# Altium PCB CTR-Upper-Main-Board-Rev-A.PcbDoc
Units mm, origin at the board's own origin, x right, y up, seen from the top; angles counter-clockwise.
Board outline 39.6 x 39.89 mm, 2 copper layers (Top Layer, Bottom Layer), stack 1.554 mm thick; 16 components, 8 nets, 34 pads, 26 vias.
Unrouted connection lines stored in the file: 20.
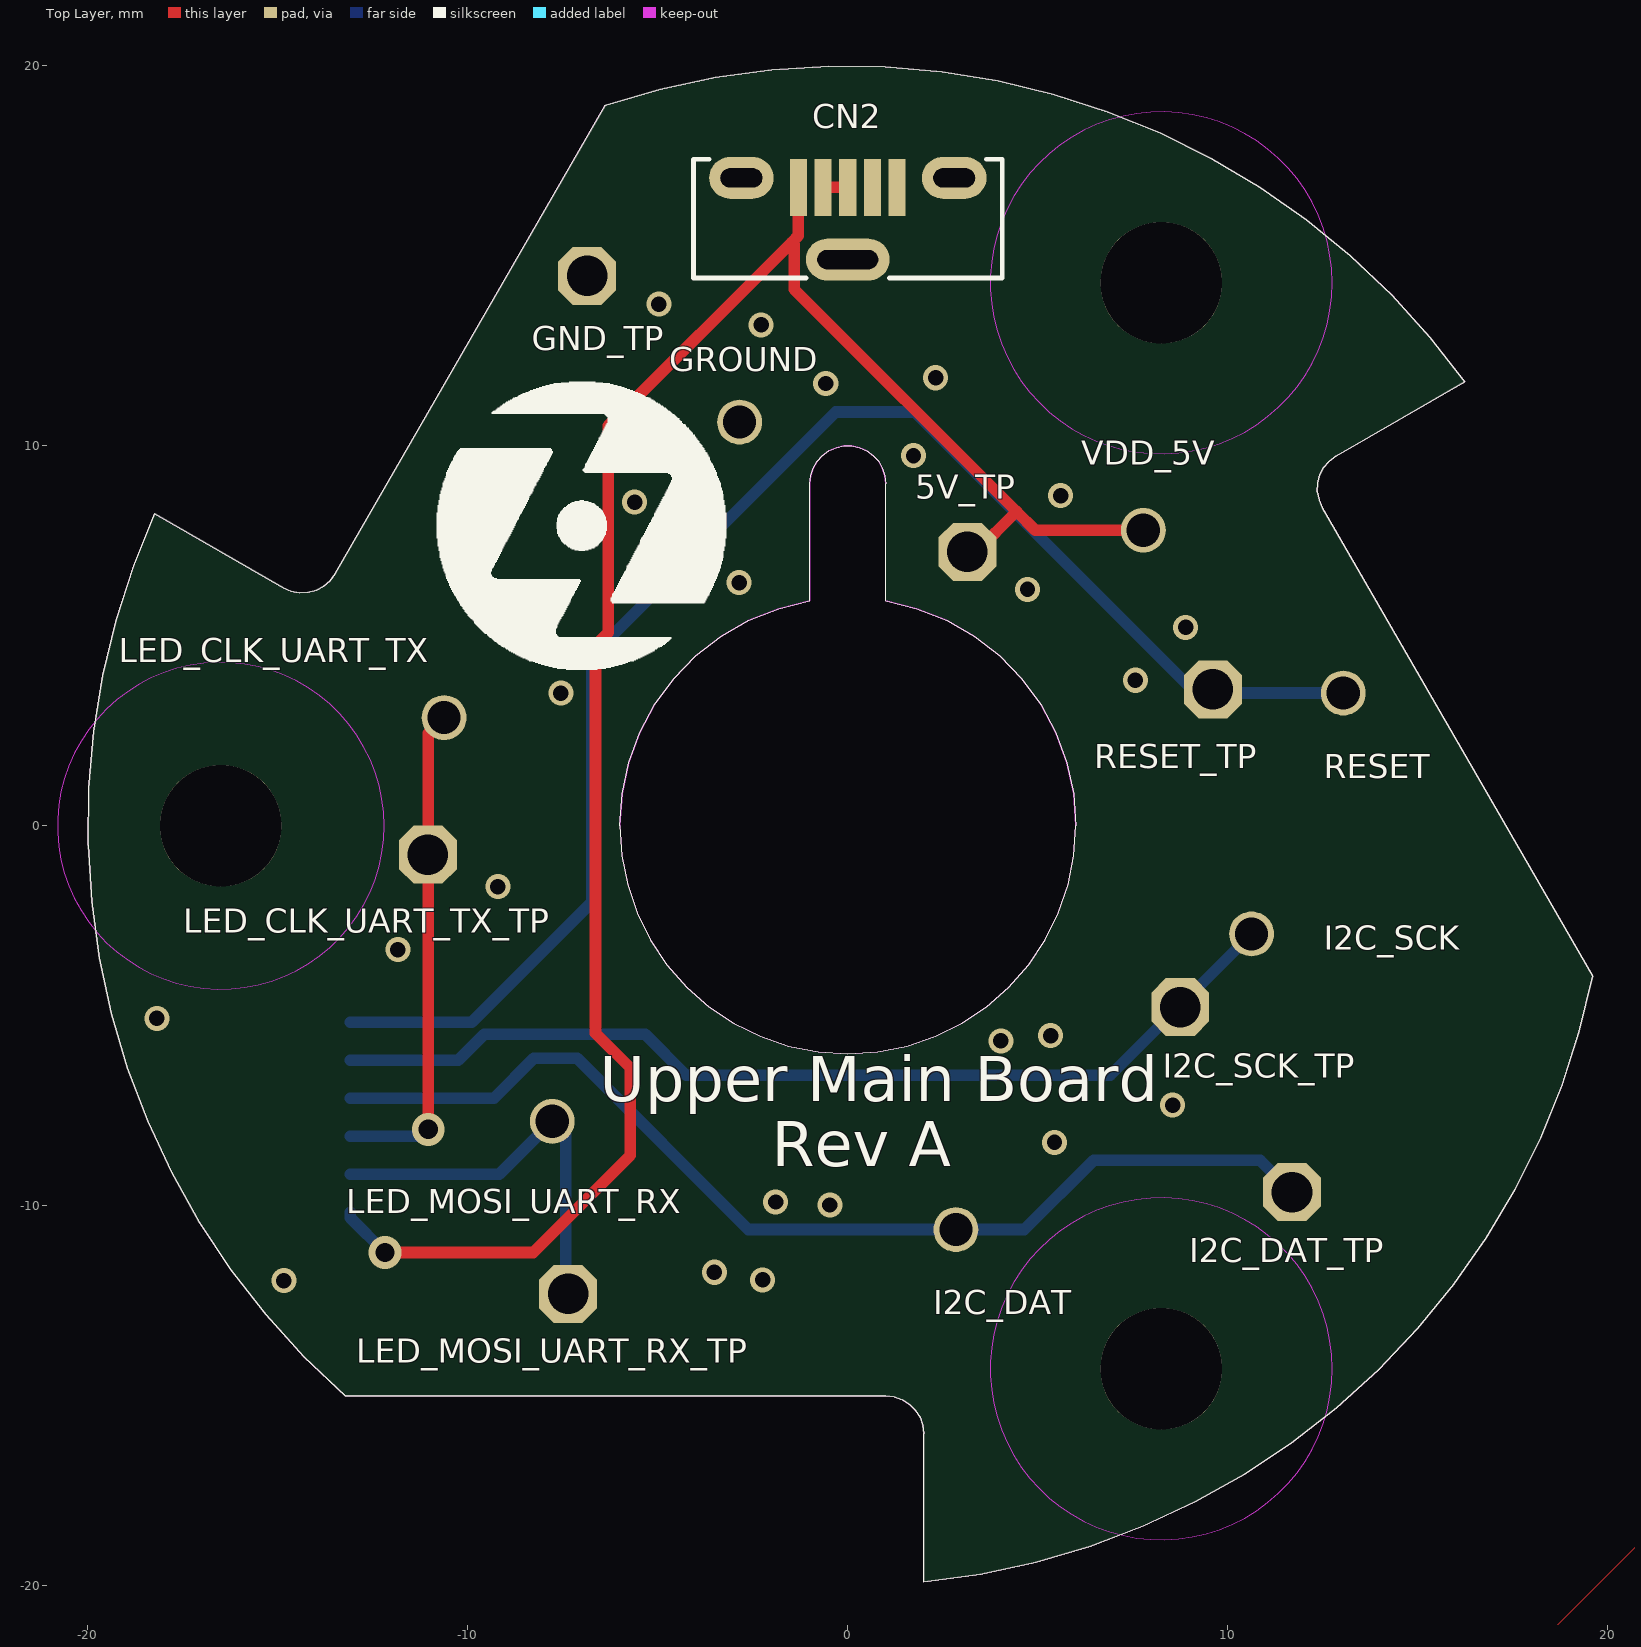
[diagram p0: Top Layer view]
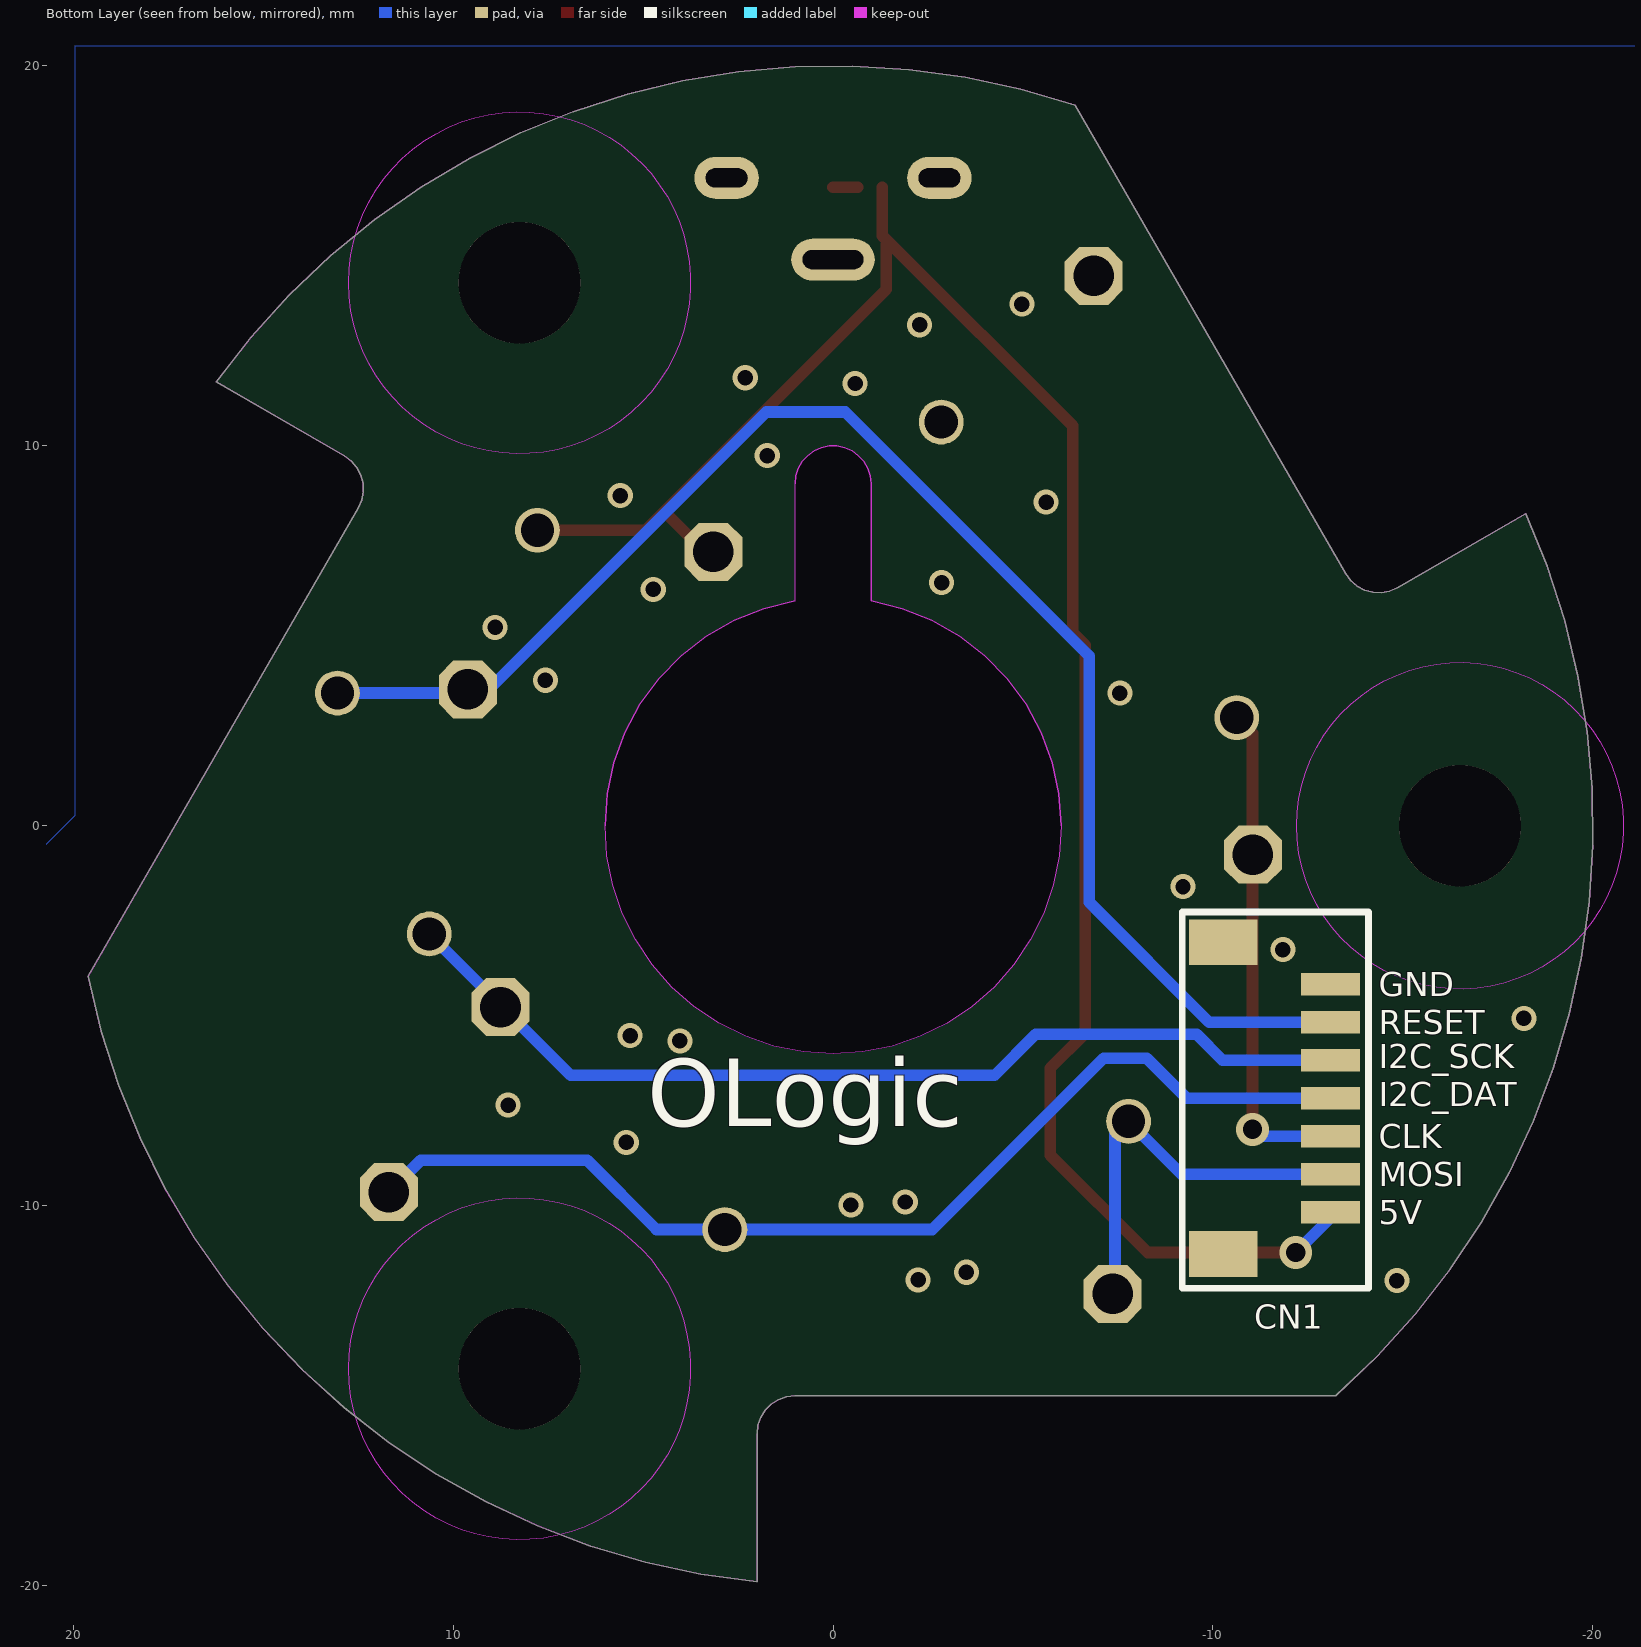
[diagram p1: Bottom Layer view, seen from below]

## Layer stack, top to bottom
Top Solder: solder mask 0.0102, Solder Resist, Dk 3.5
Top Layer: signal copper 0.0457
Dielectric1: core 1.463, Dk 4.2
Bottom Layer: signal copper 0.0457
Bottom Solder: solder mask 0.0102, Solder Resist, Dk 3.5

## Board outline
-13.49,6.634 -6.376,18.956 -4.942,19.38 -3.48,19.695 -1.998,19.9 -0.506,19.994 0.99,19.975 2.48,19.846 3.956,19.605 5.41,19.255 6.833,18.796 8.219,18.233 9.558,17.568 10.844,16.805 12.07,15.948 13.227,15.001 14.311,13.971 15.315,12.862 16.234,11.682 12.856,9.732 12.676,9.599 12.53,9.429 12.426,9.231 12.368,9.015 12.359,8.791 12.401,8.571 12.49,8.366 19.605,-3.956 19.254,-5.41 18.796,-6.834 18.233,-8.219 17.568,-9.559 16.804,-10.845 15.947,-12.07 15.001,-13.228 13.97,-14.312 12.862,-15.316 11.681,-16.234 10.435,-17.062 9.131,-17.794 7.776,-18.426 6.378,-18.956 4.943,-19.379 3.481,-19.695 2,-19.9 2,-16 1.975,-15.777 1.901,-15.566 1.782,-15.377 1.623,-15.218 1.434,-15.099 1.223,-15.025 1,-15 -13.229,-15 -14.313,-13.97 -15.316,-12.861 -16.235,-11.681 -17.062,-10.435 -17.794,-9.131 -18.427,-7.775 -18.956,-6.377 -19.38,-4.942 -19.695,-3.481 -19.9,-1.999 -19.994,-0.507 -19.976,0.989 -19.846,2.479 -19.605,3.955 -19.255,5.409 -18.797,6.832 -18.234,8.218 -14.856,6.268 -14.651,6.178 -14.431,6.137 -14.207,6.145 -13.991,6.203 -13.793,6.308 -13.623,6.454
cut-out: -1,9 -1,5.916 -1.818,5.718 -2.6,5.408 -3.33,4.991 -3.996,4.476 -4.583,3.873 -5.079,3.194 -5.476,2.452 -5.765,1.662 -5.941,0.839 -6,0 -5.949,-0.783 -5.796,-1.553 -5.543,-2.296 -5.196,-3 -4.76,-3.653 -4.243,-4.243 -3.653,-4.76 -3,-5.196 -2.296,-5.543 -1.553,-5.796 -0.783,-5.949 0,-6 0.783,-5.949 1.553,-5.796 2.296,-5.543 3,-5.196 3.653,-4.76 4.243,-4.243 4.76,-3.653 5.196,-3 5.543,-2.296 5.796,-1.553 5.949,-0.783 6,0 5.941,0.839 5.765,1.662 5.476,2.452 5.079,3.194 4.583,3.873 3.996,4.476 3.33,4.991 2.6,5.408 1.818,5.718 1,5.916 1,9 0.978,9.208 0.914,9.407 0.809,9.588 0.669,9.743 0.5,9.866 0.309,9.951 0.105,9.995 -0.105,9.995 -0.309,9.951 -0.5,9.866 -0.669,9.743 -0.809,9.588 -0.914,9.407 -0.978,9.208

## Design rules (kind name [scope] priority, off if disabled: settings)
Clearance [All] p1: gap=0.152 ignorepadtopadclearanceinfootprint=FALSE except(0: Arc-Hole Track-Hole SMDPad-Hole THPad-Hole Via-Hole Fill-Hole Poly-Hole Region-Hole Text-Hole)
ComponentClearance ComponentClearance_BAT [InComponent('BT1') vs InComponent('CN3')] p1: gap=0 collisioncheckmode=3 verticalgap=0 showdistances=FALSE
ComponentClearance [All] p2: gap=0.178 collisioncheckmode=3 verticalgap=0.178 showdistances=FALSE
HoleSize [All] p1: absolutevalues=TRUE maxlimit=7.62 minlimit=0.254 maxpercent=80.000 minpercent=20.000
HoleToHoleClearance [All] p1: gap=0.178 allowstackedmicrovias=TRUE
MinimumSolderMaskSliver [InNet('VIN')] p1: minsoldermaskwidth=0.013
NetAntennae NetAntennae_ANT [InNetClass('ANT')] p1: netantennaetolerance=0
NetAntennae [All] p2: netantennaetolerance=0
PolygonConnect [All] p1: connectstyle=Relief reliefconductorwidth=0.254 reliefentries=4 polygonreliefangle="90 Angle" airgapwidth=0.254
RoutingVias [All] p1: holewidth=0.508 width=0.864 viastyle="Through Hole" minholewidth=0.254 minwidth=0.559 maxholewidth=0.889 maxwidth=1.27
SMDNeckDown [All] p1: percent=120.000
SilkToBoardRegionClearance [InNet('3.3V')] p1:
SilkToSilkClearance [All] p1: silktosilkclearance=0
SilkToSolderMaskClearance [IsPad] p1: minsilkscreentomaskgap=0 clearancetoexposedcopper=TRUE
SolderMaskExpansion [All] p1: expansion=0.102
Width Width_BT [InNetClass('BT')] p1: maxlimit=1.016 minlimit=0.254 preferedwidth=0.381
Width Width_VDD [InNet('3.3V')] p2: maxlimit=0.508 minlimit=0.178 preferedwidth=0.254
Width [All] p3: maxlimit=0.762 minlimit=0.152 preferedwidth=0.178
22 further rules are at their usual default settings.

## Classes and differential pairs
component class IMU: 5V_TP GND_TP I2C_DAT_TP I2C_SCK_TP LED_CLK_UART_TX_TP LED_MOSI_UART_RX_TP RESET_TP

## Components (designator, comment, footprint, x,y, rotation, side; value= is the part's Value field where it differs from the comment)
5V_TP "Test Point" "TestPoint-TH 42 mil" 3.15,7.21 r90 top
CN1 "JST-BM07B-SRSS-TB(LF)(SN)" JST-BM07B-SRSS-TB(LF)(SN) -11.278,-7.17 r90 bottom
CN2 "USB-uB-V" MOLEX_105133-0011 0,16 r0 top
GND_TP "Test Point" "TestPoint-TH 42 mil" -6.86,14.47 r90 top
GROUND "Pogo Pin Target Large" CTR_POGO_PIN_TARGET -2.847,10.625 r90 top
I2C_DAT "Pogo Pin Target Large" CTR_POGO_PIN_TARGET 2.847,-10.625 r90 top
I2C_DAT_TP "Test Point" "TestPoint-TH 42 mil" 11.69,-9.64 r90 top
I2C_SCK "Pogo Pin Target Large" CTR_POGO_PIN_TARGET 10.625,-2.847 r90 top
I2C_SCK_TP "Test Point" "TestPoint-TH 42 mil" 8.75,-4.77 r90 top
LED_CLK_UART_TX "Pogo Pin Target Large" CTR_POGO_PIN_TARGET -10.625,2.847 r90 top
LED_CLK_UART_TX_TP "Test Point" "TestPoint-TH 42 mil" -11.05,-0.76 r90 top
LED_MOSI_UART_RX "Pogo Pin Target Large" CTR_POGO_PIN_TARGET -7.778,-7.778 r90 top
LED_MOSI_UART_RX_TP "Test Point" "TestPoint-TH 42 mil" -7.36,-12.32 r90 top
RESET "Pogo Pin Target Large" CTR_POGO_PIN_TARGET 13.04,3.494 r90 top
RESET_TP "Test Point" "TestPoint-TH 42 mil" 9.61,3.59 r90 top
VDD_5V "Pogo Pin Target Large" CTR_POGO_PIN_TARGET 7.778,7.778 r90 top

## Footprints (in the part's own frame and the unit in brackets; to place one, negate y for a bottom-side part, rotate by r counter-clockwise, add the part's x,y. Pads: shape width x height; smd on the part's side, far side on the other; paste and mask are expansions set on the pad)
CTR_POGO_PIN_TARGET [mil] "Through-hole pogo pin target"
  round 46.5 hole 34.5: 1(0,0)
  body extent -43,-43 44,44, height 266
JST-BM07B-SRSS-TB(LF)(SN) [mm] "7 Position x 1mm Top Entry Locking Header"
  rect 1.2x1.8 smd: 0(-4.1,1.013) 0(4.1,1.013)
  rect 0.6x1.55 smd: 1(-3,-1.812) 2(-2,-1.812) 3(-1,-1.812) 4(0,-1.812) 5(1,-1.812) 6(2,-1.812) 7(3,-1.812)
  silkscreen extent -5,-2.81 4.9,2.09, body extent -4.5,-1.81 4.5,1.79, height 4.25
MOLEX_105133-0011 [mm] "Connector, USB Receptacle Right Angle; 8 pin, 8.00 mm L X 3.00 mm W X 6.70 mm H body"
  rrect100% 1.7x1.1 hole 0.5 slot 1.1 at 0 deg paste-1.7: 0(-2.8,1.05) 0(2.8,1.05)
  rrect100% 2.2x1.1 hole 0.5 slot 1.6 at 0 deg paste-2.2: 0(0,-1.1)
  rect 0.45x1.5 smd: 1(-1.3,0.8) 2(-0.65,0.8) 3(0,0.8) 4(0.65,0.8) 5(1.3,0.8)
  silkscreen extent -4.06,-1.58 4.06,1.54, body extent -4.03,-1.58 3.97,1.43, height 6.71
"TestPoint-TH 42 mil" [mil] "Test Point - Thru-Hole 42 mil"
  oct 60x60 hole 42: 1(0,0)

## Part data
5V_TP GND_TP I2C_DAT_TP I2C_SCK_TP LED_CLK_UART_TX_TP LED_MOSI_UART_RX_TP RESET_TP: library part "TestPoint, small"
CN1: "1mm Locking Header, 7-Pin"
CN2: library part USB-MicroB-V, "USB, Micro-B, Vertical"
GROUND I2C_DAT I2C_SCK LED_CLK_UART_TX LED_MOSI_UART_RX RESET VDD_5V: library part "CTR Pogo Pin Target Large", "CTR Pogo Pin Target Large"

## Free pads (board coordinates)
  round 3.2 hole 3.2: 1(-16.5,0) 1(8.25,-14.289) 1(8.25,14.289)

## Via types
v1: diameter 0.66, hole 0.406, Top Layer to Bottom Layer, tented bottom, 24 vias
v2: diameter 0.864, hole 0.508, Top Layer to Bottom Layer, tented both sides, 2 vias

## Nets (pads, with @x,y where several pads share a name; then routed paths per layer and width w, separated by ;. In a path a pad name is that pad's centre, name@x,y a point inside that pad or via, vN(x,y) a via of type N, cw(c..) or ccw(c..) an arc to the next point about the centre after c; other vN are vias at no path point)
5V: 5V_TP.1 CN1.1 CN2.1 VDD_5V.1 | length 51.8
  Top Layer w0.305: v2(-12.18,-11.23) -8.28,-11.23 -5.72,-8.67 -5.72,-6.376 -6.64,-5.456 -6.64,4.751 -6.305,5.086 -6.305,10.525 -1.47,15.36 ; CN2.1 -1.3,15.53 -1.47,15.36 ; 5V_TP.1 3.38,7.21 4.44,8.27 ; VDD_5V.1 4.932,7.778 4.44,8.27 ; -1.47,15.36 -1.405,15.295 -1.405,14.115 4.44,8.27
  Bottom Layer w0.305: CN1.1 -13.09,-10.32 v2(-12.18,-11.23)
GND: CN1.0 CN1.7 CN2.0 CN2.5 GND_TP.1 GROUND.1
  other v1: -14.84,-11.97 -2.24,-11.95 -3.51,-11.75 -0.47,-9.98 -1.9,-9.9 5.44,-8.33 8.55,-7.35 4.03,-5.66 5.34,-5.52 -18.18,-5.07 -11.84,-3.26 -9.21,-1.6
NetCN1_2: CN1.2 LED_MOSI_UART_RX.1 LED_MOSI_UART_RX_TP.1 | length 10.6
  Bottom Layer w0.305: CN1.2 -9.17,-9.17 LED_MOSI_UART_RX.1 -7.42,-8.136 LED_MOSI_UART_RX_TP.1@-7.42,-12.32
NetCN1_3: CN1.3 LED_CLK_UART_TX.1 LED_CLK_UART_TX_TP.1 | length 13.1
  Top Layer w0.305: v2(-11.04,-7.99) -11.04,2.432 LED_CLK_UART_TX.1
  Bottom Layer w0.305: CN1.3 -11.22,-8.17 v2(-11.04,-7.99)
NetCN1_4: CN1.4 I2C_DAT.1 I2C_DAT_TP.1 | length 28.2
  Bottom Layer w0.305: CN1.4 -9.31,-7.17 -8.26,-6.12 -7.12,-6.12 -2.615,-10.625 I2C_DAT.1 4.645,-10.625 6.47,-8.8 10.85,-8.8 I2C_DAT_TP.1
NetCN1_5: CN1.5 I2C_SCK.1 I2C_SCK_TP.1 | length 26
  Bottom Layer w0.305: CN1.5 -10.25,-6.17 -9.57,-5.49 -5.33,-5.49 -4.25,-6.57 6.902,-6.57 I2C_SCK.1
NetCN1_6: CN1.6 RESET.1 RESET_TP.1 | length 39.6
  Bottom Layer w0.305: CN1.6 -9.897,-5.17 -6.74,-2.013 -6.74,4.468 -0.318,10.89 1.76,10.89 9.156,3.494 RESET.1
NetCN2_2: CN2.2 CN2.3 | length 0.7
  Top Layer w0.305: CN2.2 CN2.3
pads on no net: CN2.4
copper on no net:
  other v1: -7.55,3.49 7.57,3.83 8.89,5.22 4.73,6.22 -2.86,6.4 -5.61,8.52 5.6,8.69 1.73,9.74 -0.58,11.64 2.31,11.79 -2.28,13.18 -4.97,13.73

## Polygon pours and split planes (outlines as drawn)
GND on Top Layer "GND_L01_P002" (solid, remove dead copper, shelved, pour order 2): -25.18,22.7 -24.64,22.16 20.93,22.16 20.93,-18.77 17.6,-22.1 17.38,-21.88 -27.09,-21.88
GND on Bottom Layer "GND_L02_P000" (solid, remove dead copper, shelved, pour order 0): -22.45,20.9 -22.07,20.52 19.95,20.52 19.95,0.27 22.68,-2.46 22.14,-3 22.14,-23.85 -23.54,-23.85 -23.76,-23.63

## Keep-outs
Keep-Out Layer:
  circle w0.025: c-16.5,0 r4.3
  circle w0.025: c8.25,-14.289 r4.5
  circle w0.025: c8.25,14.289 r4.5
  lines w0.025: -19.994,-0.507 -19.9,-1.999 -19.695,-3.481 -19.38,-4.942 -18.956,-6.377 -18.427,-7.775 -17.794,-9.131 -17.062,-10.435 -16.235,-11.681 -15.316,-12.861 -14.313,-13.97 -13.229,-15 1,-15 1.223,-15.025 1.434,-15.099 1.623,-15.218 1.782,-15.377 1.901,-15.566 1.975,-15.777 2,-16 2,-19.9 3.481,-19.695 4.943,-19.379 6.378,-18.956 7.776,-18.426 9.131,-17.794 10.435,-17.062 11.681,-16.234 12.862,-15.316 13.97,-14.312 15.001,-13.228 15.947,-12.07 16.804,-10.845 17.568,-9.559 18.233,-8.219 18.796,-6.834 19.254,-5.41 19.605,-3.956 12.49,8.366 12.401,8.571 12.359,8.791 12.368,9.015 12.426,9.231 12.53,9.429 12.676,9.599 12.856,9.732 16.234,11.682 15.315,12.862 14.311,13.971 13.227,15.001 12.07,15.948 10.844,16.805 9.558,17.568 8.219,18.233 6.833,18.796 5.41,19.255 3.956,19.605 2.48,19.846 0.99,19.975 -0.506,19.994 -1.998,19.9 -3.48,19.695 -4.942,19.38 -6.376,18.956 -13.49,6.634 -13.623,6.454 -13.793,6.308 -13.991,6.203 -14.207,6.145 -14.431,6.137 -14.651,6.178 -14.856,6.268 -18.234,8.218 -18.797,6.832 -19.255,5.409 -19.605,3.955 -19.846,2.479 -19.976,0.989 -19.994,-0.507 ; -6,0 -5.941,0.839 -5.765,1.662 -5.476,2.452 -5.079,3.194 -4.583,3.873 -3.996,4.476 -3.33,4.991 -2.6,5.408 -1.818,5.718 -1,5.916 -1,9 -0.978,9.208 -0.914,9.407 -0.809,9.588 -0.669,9.743 -0.5,9.866 -0.309,9.951 -0.105,9.995 0.105,9.995 0.309,9.951 0.5,9.866 0.669,9.743 0.809,9.588 0.914,9.407 0.978,9.208 1,9 1,5.916 1.818,5.718 2.6,5.408 3.33,4.991 3.996,4.476 4.583,3.873 5.079,3.194 5.476,2.452 5.765,1.662 5.941,0.839 6,0 5.949,-0.783 5.796,-1.553 5.543,-2.296 5.196,-3 4.76,-3.653 4.243,-4.243 3.653,-4.76 3,-5.196 2.296,-5.543 1.553,-5.796 0.783,-5.949 0,-6 -0.783,-5.949 -1.553,-5.796 -2.296,-5.543 -3,-5.196 -3.653,-4.76 -4.243,-4.243 -4.76,-3.653 -5.196,-3 -5.543,-2.296 -5.796,-1.553 -5.949,-0.783 -6,0

## Silkscreen, mask and mechanical layers (free items; w line width, h text height)
Top Overlay:
  drawing of 652 lines, arcs and shapes, not listed
  text "Upper Main Board" at -6.53,-7.64 h2.03
  text "Rev A" at -2,-9.36 h2.03
Bottom Overlay:
  text "GND" at -14.362,-4.487 h0.64
  text "RESET" at -14.362,-5.487 h0.64
  text "I2C_SCK" at -14.362,-6.382 h0.64
  text "I2C_DAT" at -14.362,-7.382 h0.64
  text "CLK" at -14.362,-8.487 h0.64
  text "OLogic" at 4.89,-8.5 h3.05
  text "MOSI" at -14.362,-9.487 h0.64
  text "5V" at -14.362,-10.487 h0.64
Mechanical 1:
  lines w0.025: -19.994,-0.507 -19.9,-1.999 -19.695,-3.481 -19.38,-4.942 -18.956,-6.377 -18.427,-7.775 -17.794,-9.131 -17.062,-10.435 -16.235,-11.681 -15.316,-12.861 -14.313,-13.97 -13.229,-15 1,-15 1.223,-15.025 1.434,-15.099 1.623,-15.218 1.782,-15.377 1.901,-15.566 1.975,-15.777 2,-16 2,-19.9 3.481,-19.695 4.943,-19.379 6.378,-18.956 7.776,-18.426 9.131,-17.794 10.435,-17.062 11.681,-16.234 12.862,-15.316 13.97,-14.312 15.001,-13.228 15.947,-12.07 16.804,-10.845 17.568,-9.559 18.233,-8.219 18.796,-6.834 19.254,-5.41 19.605,-3.956 12.49,8.366 12.401,8.571 12.359,8.791 12.368,9.015 12.426,9.231 12.53,9.429 12.676,9.599 12.856,9.732 16.234,11.682 15.315,12.862 14.311,13.971 13.227,15.001 12.07,15.948 10.844,16.805 9.558,17.568 8.219,18.233 6.833,18.796 5.41,19.255 3.956,19.605 2.48,19.846 0.99,19.975 -0.506,19.994 -1.998,19.9 -3.48,19.695 -4.942,19.38 -6.376,18.956 -13.49,6.634 -13.623,6.454 -13.793,6.308 -13.991,6.203 -14.207,6.145 -14.431,6.137 -14.651,6.178 -14.856,6.268 -18.234,8.218 -18.797,6.832 -19.255,5.409 -19.605,3.955 -19.846,2.479 -19.976,0.989 -19.994,-0.507 ; -6,0 -5.941,0.839 -5.765,1.662 -5.476,2.452 -5.079,3.194 -4.583,3.873 -3.996,4.476 -3.33,4.991 -2.6,5.408 -1.818,5.718 -1,5.916 -1,9 -0.978,9.208 -0.914,9.407 -0.809,9.588 -0.669,9.743 -0.5,9.866 -0.309,9.951 -0.105,9.995 0.105,9.995 0.309,9.951 0.5,9.866 0.669,9.743 0.809,9.588 0.914,9.407 0.978,9.208 1,9 1,5.916 1.818,5.718 2.6,5.408 3.33,4.991 3.996,4.476 4.583,3.873 5.079,3.194 5.476,2.452 5.765,1.662 5.941,0.839 6,0 5.949,-0.783 5.796,-1.553 5.543,-2.296 5.196,-3 4.76,-3.653 4.243,-4.243 3.653,-4.76 3,-5.196 2.296,-5.543 1.553,-5.796 0.783,-5.949 0,-6 -0.783,-5.949 -1.553,-5.796 -2.296,-5.543 -3,-5.196 -3.653,-4.76 -4.243,-4.243 -4.76,-3.653 -5.196,-3 -5.543,-2.296 -5.796,-1.553 -5.949,-0.783 -6,0